# EAGLE board BleShield_teardrops_B2-16 (EAGLE 6.4)
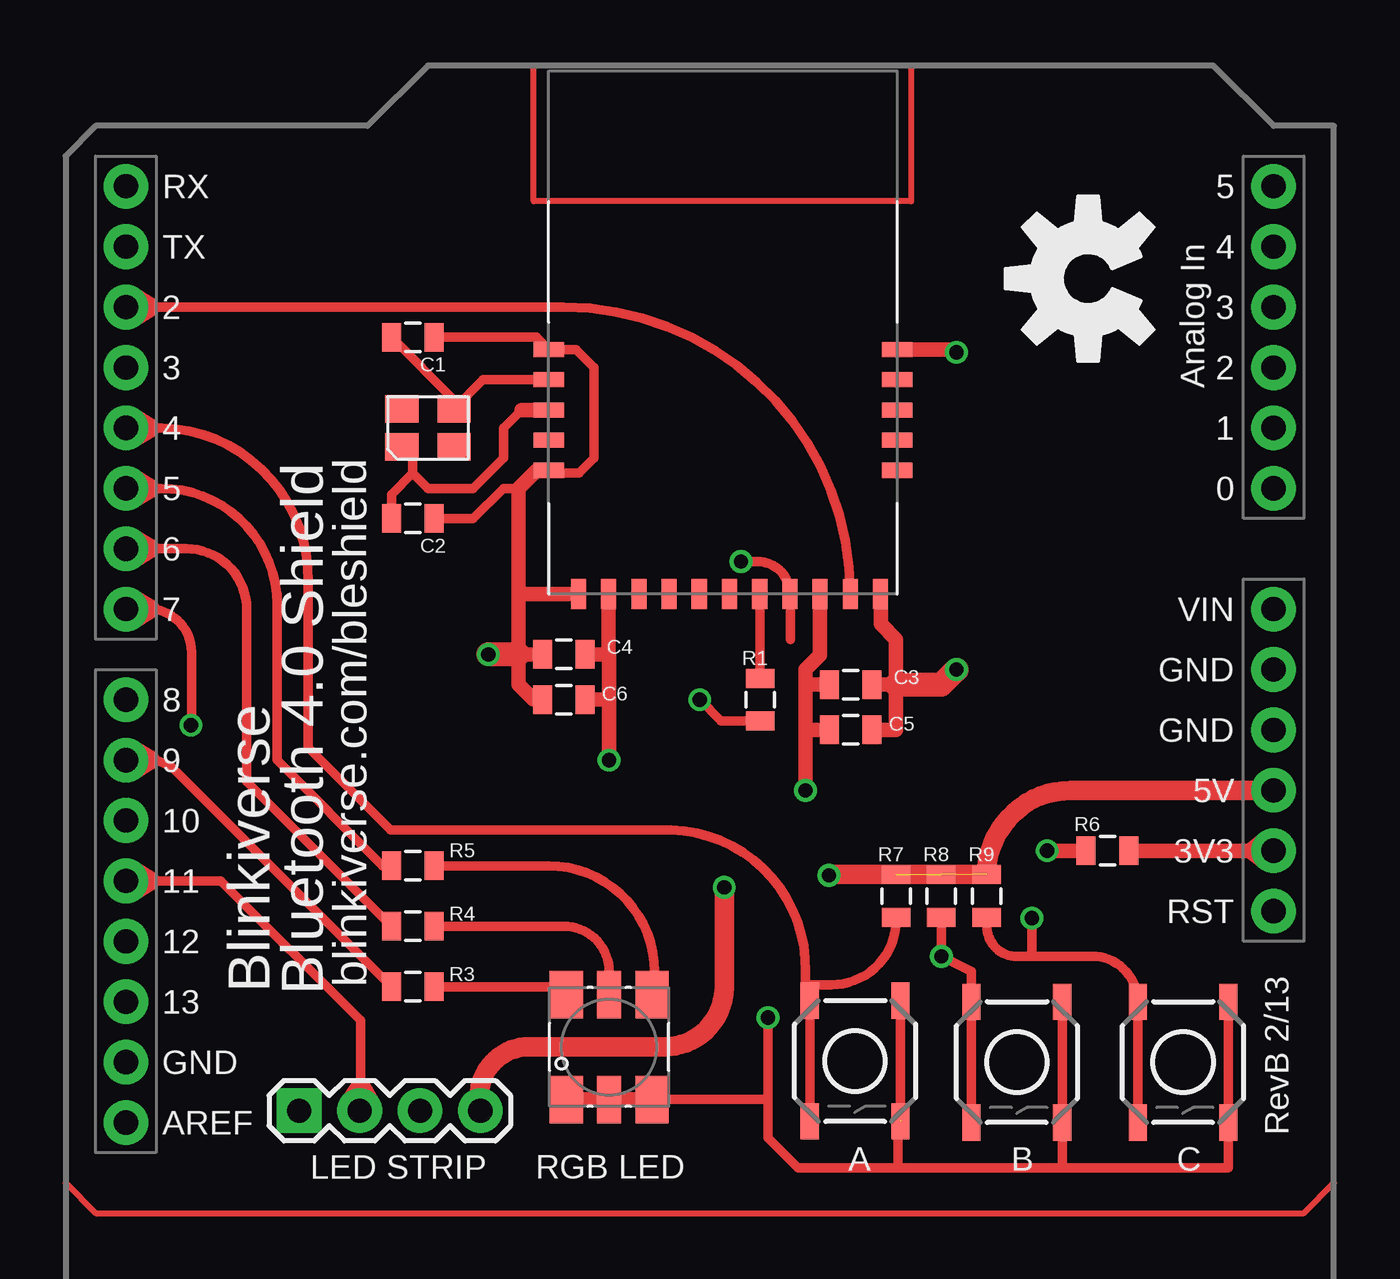
[diagram p0: board, top side]
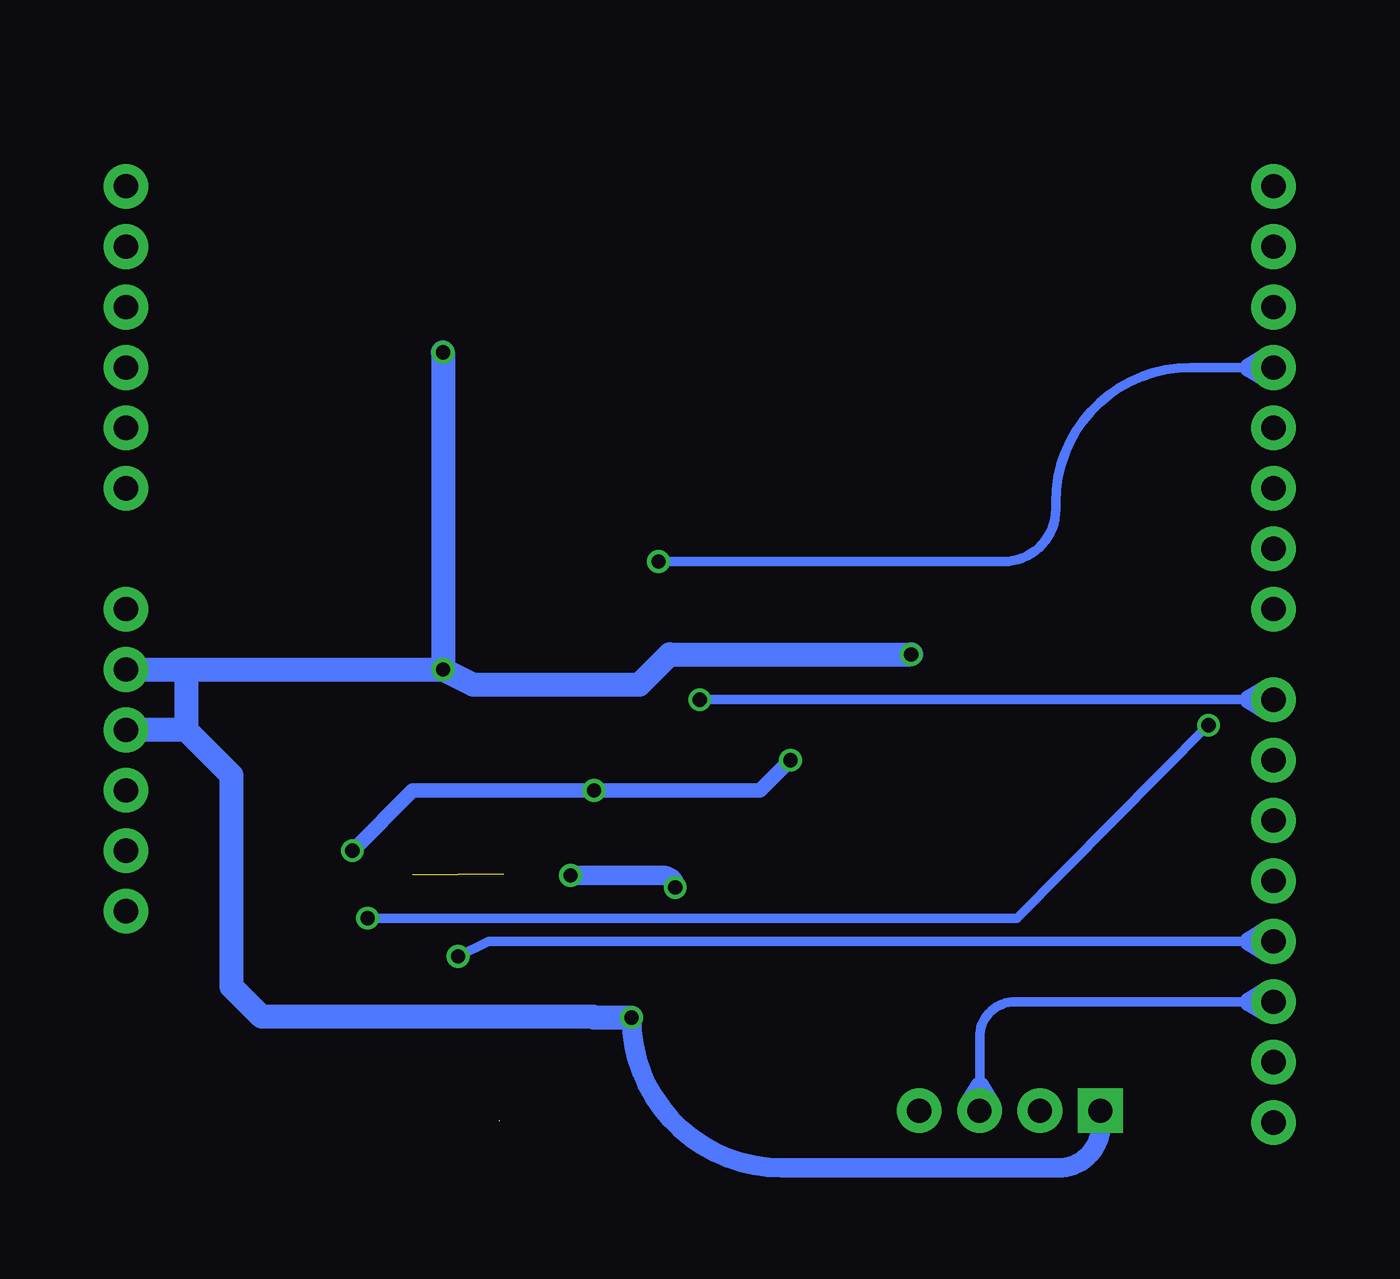
[diagram p1: board, bottom side, seen from below]

No outline drawn. Coordinates in mm, seen from the top.
Copper layers (1*16): Top 0.0356mm / dielectric 1.5011mm / Bottom 0.0356mm
Design rules "default": minimum track width 6mil, minimum drill 13mil, track to track 6mil, track to pad 6mil, pad to pad 6mil, via to via 6mil, smd to smd 6mil, copper to edge 15mil, drill to drill 6mil, minimum pad ring 7mil, minimum via ring 7mil, stop-mask expansion 4mil, vias tented up to drill 0mil, thermal gap 10mil

## Footprints (pad centres in the part's own frame; a part is rotated, then mirrored left to right if it is on the bottom)
TACTILE_SWITCH_SMD = smd 1.524 x 0.762: 1 -2.54,1.905; 2 2.54,1.905; 3 -2.54,-1.905; 4 2.54,-1.905
0805 = smd 0.8 x 1.2: 1 -0.9,0; 2 0.9,0
1X04 = drill 1.016 pad 1.88 square: 1 0,0 | drill 1.016 pad 1.88: 2 2.54,0; 3 5.08,0; 4 7.62,0
LED-TRICOLOR-5050-FIXED = smd 2 x 1.4: 1 -2.2,1.8; 3 -2.2,-1.8; 4 2.2,-1.8; 6 2.2,1.8 | smd 2 x 1: 2 -2.2,0; 5 2.2,0
DUEMILANOVE_SHIELD_NOHOLES = drill 1.016 pad 1.88: 3.3V 50.8,26.67; 5V 50.8,29.21; A0 50.8,41.91; A1 50.8,44.45; A2 50.8,46.99; A3 50.8,49.53; A4 50.8,52.07; A5 50.8,54.61; AREF 2.54,15.24; D2 2.54,49.53; D3 2.54,46.99; D4 2.54,44.45; D5 2.54,41.91; D6 2.54,39.37; D7 2.54,36.83; D8 2.54,33.02; D9 2.54,30.48; D10 2.54,27.94; D11 2.54,25.4; D12 2.54,22.86; D13 2.54,20.32; GND@0 50.8,31.75; GND@1 50.8,34.29; GND@2 2.54,17.78; RES 50.8,24.13; RX 2.54,54.61; TX 2.54,52.07; VIN 50.8,36.83
BG312L = smd 1.27 x 0.635: GND_1 0,10.28; GND_2 0,5.2; GND_5 14.65,10.28; P0_4 14.65,9.01; P0_5 14.65,7.74; P0_6 14.65,6.47; P0_7 14.65,5.2; P2_0 0,6.47; X_OSC1 0,9.01; X_OSC2 0,7.74 | smd 0.635 x 1.27: GND_3 1.25,0; GND_4 13.95,0; P1_4/CT 6.33,0; P1_5/RT 7.6,0; P1_6/TX 10.14,0; P1_7/RX 12.68,0; P2_1 5.06,0; P2_2 3.79,0; RESET 8.87,0; VDD_1 2.52,0; VDD_2 11.41,0
XS3225 = smd 1.4 x 1.15: P$1 -1.1,-0.8; P$2 1.1,-0.8; P$3 1.1,0.8; P$4 -1.1,0.8

## Placement (x,y rotation side)
A  [TACTILE_SWITCH_SMD]  33.2,6.4 270 top
B  [TACTILE_SWITCH_SMD]  40.01,6.35 270 top
C  [TACTILE_SWITCH_SMD]  46.99,6.35 270 top
C1  15pf  [0805]  14.61,36.83 180 top
C2  15pf  [0805]  14.61,29.21 180 top
C3  10uf  [0805]  33.02,22.23 180 top
C4  10uf  [0805]  20.95,23.5 0 top
C5  100nf  [0805]  33.02,20.32 180 top
C6  100nf  [0805]  20.95,21.59 0 top
LED STRIP  [1X04]  9.82,4.31 0 top
R1  10K  [0805]  29.21,21.59 90 top
R3  330  [0805]  14.61,9.53 0 top
R4  330  [0805]  14.61,12.06 0 top
R5  330  [0805]  14.61,14.61 0 top
R6  0  [0805]  43.81,15.24 180 top
R7  10K  [0805]  34.92,13.34 90 top
R8  10K  [0805]  36.83,13.34 90 top
R9  10K  [0805]  38.73,13.34 90 top
RGB LED  LED-TRICOLOR-5050"  [LED-TRICOLOR-5050-FIXED]  22.86,6.99 90 top
U1  ARDUINO_SHIELDNOHOLES  [DUEMILANOVE_SHIELD_NOHOLES]  0,-11.43 0 top
U$1  BG213L  [BG312L]  20.32,26.04 0 top
U$7  [OSHW-LOGO-L]  43,39.3 90 top
Y1  32.768KHz, 10 PPM  [XS3225]  15.24,33.02 0 top

## Library data of the parts
A B C C1-C6 LED STRIP R1 R3-R9 U1 = SparkFun
RGB LED U$7 Y1 = blinkiverse
U$1 = BLE

## Nets
3.3V: R6.1 U1.3.3V
5V: LED STRIP.4 R7.2 R8.2 R9.2 U1.5V
GND: A.1 A.2 B.1 B.2 C1.1 C2.1 C3.1 C4.1 C5.1 C6.1 C.1 C.2 LED STRIP.1 RGB LED.1 RGB LED.2 RGB LED.3 U1.GND@0 U1.GND@1 U$1.GND_1 U$1.GND_2 U$1.GND_3 U$1.GND_4 U$1.GND_5
LED_BLUE: R3.1 U1.D9
LED_GREEN: R5.1 U1.D5
LED_RED: R4.1 U1.D6
MOSI: LED STRIP.2 U1.D11
N$1: R1.2 U$1.RESET
N$2: R3.2 RGB LED.6
N$3: C1.2 U$1.X_OSC1 Y1.P$3
N$4: C2.2 U$1.X_OSC2 Y1.P$1
N$5: R5.2 RGB LED.4
N$6: R4.2 RGB LED.5
N$8: C3.2 C4.2 C5.2 C6.2 R6.2 U$1.VDD_1 U$1.VDD_2
RESET: R1.1 U1.D8
RX: U1.D2 U$1.P1_7/RX
SCK: LED STRIP.3 U1.D13
SWITCH_A: A.3 A.4 R7.1 U1.D4
SWITCH_B: B.3 B.4 R8.1 U1.D12
SWITCH_C: C.3 C.4 R9.1 U1.D7
TX: U1.D3 U$1.P1_6/TX

## Tracks (layer width: path | path; a pad name or v marks a point on that pad's centre or on a via)
3.3V
  Top 0.61: U1.3.3V 49.78,15.24 | 49.78,15.24 | 49.78,15.24 R6.1 | 49.78,15.24 | 49.78,15.24 50.4,15.74 | 49.78,15.24 50.4,14.74 | 50.4,14.74 | U1.3.3V 50.4,14.74 | 49.78,15.24 50.4,15.74 | U1.3.3V 50.4,15.74 | 49.78,15.24 50.4,14.74 | U1.3.3V 50.4,14.74 | 49.78,15.24 50.4,15.74 | U1.3.3V 50.4,15.74
5V  (via drill 0.6)  (2 unrouted)
  Top 0.813: v27.7,13.7 27.7,9.5 arc-90 25.2,7 19.5,7 arc90 17.4,4.9 17.4,4.36 arc90 LED STRIP.4 | U1.5V 42.28,17.78 arc90 R9.2 32.13,14.23 arc90 v32.1,14.2
  Bottom 0.813: v32.1,14.2 28.2,14.2 arc90 v27.7,13.7
GND  (via drill 0.6)  (1 unrouted)
  Top 0.406: v29.54,8.22 29.54,4.79 | 29.54,4.79 29.54,3.17 30.81,1.91 34.92,1.91 | B.2 B.1 41.91,1.91 | C.2 C.1 48.9,1.91 41.91,1.91 | 41.91,1.91 34.92,1.91 | 19.05,30.48 18.41,30.48 17.14,29.21 C2.1 | C1.1 19.8,36.83 U$1.GND_1 21.47,36.31 22.23,35.56 22.23,31.75 21.59,31.11 20.44,31.11 U$1.GND_2 | 34.92,1.91 35,1.98 35,3.8 35.1,3.9 A.1 | RGB LED.1 29.54,4.79
  Top 0.61: U$1.GND_3 19.05,26.04 | 19.05,23.5 C4.1 | C6.1 19.68,21.59 19.05,22.23 19.05,23.5 | C3.1 34.92,22.23 | 34.92,22.23 34.92,24.13 34.29,24.77 34.29,26.02 U$1.GND_4 | C5.1 34.92,20.32 34.92,22.23 | U$1.GND_5 37.34,36.31 v37.47,36.2 | 19.05,26.04 19.05,23.5 | U$1.GND_2 19.8,31.23 19.05,30.48 19.05,26.04 | RGB LED.3 RGB LED.2 RGB LED.1
  Top 1.016: 19.05,23.5 v17.78,23.5 | 34.92,22.23 36.83,22.23 v37.47,22.86
  Bottom 0.813: v29.54,8.22 arc-90 23.21,1.9 11.6,1.9 arc-90 9.8,3.7 9.8,4.29 arc-90 LED STRIP.1
  Bottom 1.016: v37.47,36.2 v37.47,22.86 | 48.26,20.32 46.35,18.41 46.35,9.53 45.09,8.26 31.14,8.26 arc-90 31.11,8.22 v29.54,8.22 | 48.26,20.32 U1.GND@0 | v37.47,22.86 36.2,22.23 29.21,22.23 27.94,23.5 v17.78,23.5 | 48.26,22.86 v37.47,22.86 | U1.GND@1 48.26,22.86 | 48.26,22.86 48.26,20.32
LED_BLUE
  Top 0.406: U1.D9 3.56,19.05 3.81,19.05 4.45,18.79 R3.1
  Top 0.813: 3.56,19.05 2.82,19.5 U1.D9 2.82,18.6 3.56,19.05
LED_GREEN
  Top 0.406: 8.89,26.04 8.89,25.6 | 8.89,25.6 8.89,19.05 13.34,14.61 R5.1 | U1.D5 3.56,30.48 4.01,30.48 arc-90 8.89,25.6
  Top 0.813: 3.56,30.48 2.82,30.93 U1.D5 2.82,30.03 3.56,30.48
LED_RED
  Top 0.406: R4.1 7.62,18.15 7.62,25.4 arc90 5.08,27.94 3.56,27.94 U1.D6
  Top 0.813: 3.56,27.94 2.82,28.39 U1.D6 2.82,27.49 3.56,27.94
MOSI
  Top 0.406: U1.D11 3.56,13.97 6.53,13.97 12.4,8.1 12.4,5.33 12.4,4.34 arc-90 LED STRIP.2
  Top 0.813: 3.56,13.97 2.82,14.42 U1.D11 2.82,13.52 3.56,13.97 | 12.4,5.33 11.92,4.61 LED STRIP.2 12.83,4.57 12.4,5.33
N$1
  Top 0.406: U$1.RESET 29.21,26.04 R1.2
N$2
  Top 0.406: R3.2 20.72,9.53 RGB LED.6
N$3
  Top 0.406: U$1.X_OSC1 17.57,35.05 Y1.P$3 16.34,34.2 C1.2
N$4
  Top 0.406: 19.17,33.77 18.41,33.02 18.41,31.75 17.14,30.48 15.24,30.48 14.61,31.11 | 14.61,31.11 14.61,31.75 Y1.P$1 | C2.2 13.71,30.21 14.61,31.11
  Top 0.61: U$1.X_OSC2 19.17,33.77
N$5
  Top 0.406: RGB LED.4 24.77,9.29 24.77,10.16 arc90 20.32,14.61 R5.2
N$6
  Top 0.406: RGB LED.5 22.86,10.16 arc90 20.95,12.06 R4.2
N$8  (via drill 0.6)
  Top 0.61: R6.2 v41.27,15.24 | v31.11,17.78 31.11,20.32 | 31.11,20.32 C5.2 | C3.2 31.11,22.23 | 31.11,22.23 31.11,20.32 | U$1.VDD_2 31.73,23.48 31.11,22.86 31.11,22.23 | U$1.VDD_1 22.84,23.52 22.86,23.5 | 22.86,23.5 C4.2 | C6.2 22.86,21.59 | 22.86,21.59 22.86,23.5 | v22.86,19.05 22.86,21.59
  Bottom 0.61: v41.27,15.24 38.73,17.78 v31.11,17.78 24.13,17.78 v22.86,19.05
N$17
  Top 0.254: 53.34,1.27 53.34,45.72 50.8,45.72 48.26,48.26 35.56,48.26 35.56,42.55 19.68,42.55 19.68,48.26 15.24,48.26 12.7,45.72 1.27,45.72 0,44.45 0,1.27 1.27,0 52.07,0 53.34,1.27
RESET  (via drill 0.6)
  Top 0.406: v26.67,21.59 27.57,20.69 R1.1
  Bottom 0.406: U1.D8 3.56,21.59 v26.67,21.59
  Bottom 0.813: 3.56,21.59 2.82,22.04 U1.D8 2.82,21.14 3.56,21.59
RX
  Top 0.406: U1.D2 3.56,38.1 20.93,38.1 arc-90 U$1.P1_7/RX
  Top 0.813: 3.56,38.1 2.82,38.55 U1.D2 2.82,37.65 3.56,38.1
SCK
  Bottom 0.406: U1.D13 3.56,8.89 13.41,8.89 arc-90 14.9,7.4 14.9,5.33 LED STRIP.3 arc90 LED STRIP.3
  Bottom 0.813: 3.56,8.89 2.82,9.34 U1.D13 2.82,8.44 3.56,8.89 | 14.9,5.33 14.45,4.59 LED STRIP.3 15.36,4.59 14.9,5.33
SWITCH_A
  Top 0.406: A.4 A.3 arc-90 31.11,9.12 31.11,9.6 | 31.11,9.6 31.11,10.16 arc90 25.46,16.11 13.67,16.11 10.2,19.59 10.2,26.57 arc90 4.04,33.02 3.56,33.02 U1.D4 | R7.1 34.92,12.32 arc-90 32.2,9.6 31.11,9.6
  Top 0.813: 3.56,33.02 2.82,33.47 U1.D4 2.82,32.57 3.56,33.02
SWITCH_B  (via drill 0.6)
  Top 0.406: B.4 B.3 38.1,10.16 v36.83,10.79 R8.1
  Bottom 0.406: U1.D12 3.56,11.43 35.56,11.43 v36.83,10.79
  Bottom 0.813: 3.56,11.43 2.82,11.88 U1.D12 2.82,10.98 3.56,11.43
SWITCH_C  (via drill 0.6)
  Top 0.406: C.4 C.3 arc90 43.17,10.8 40.4,10.8 | R9.1 38.73,12.06 arc90 40,10.8 40.4,10.8 | v40.64,12.4 40.64,11.04 arc-90 40.4,10.8 | U1.D7 3.5,25.4 arc-90 5.3,23.6 5.3,20.6 arc90 v5.28,20.52
  Top 0.813: 3.56,25.4 2.82,25.85 U1.D7 2.82,24.95 3.56,25.4
  Bottom 0.406: v40.64,12.4 13.34,12.4 v5.28,20.52
TX  (via drill 0.6)
  Top 0.406: 30.48,24.13 30.48,26.02 U$1.P1_6/TX arc90 29.09,27.4 v28.4,27.4
  Bottom 0.406: v28.4,27.4 13.9,27.4 arc-90 11.7,29.6 11.7,29.9 arc90 6.04,35.56 3.56,35.56 U1.D3
  Bottom 0.813: 3.56,35.56 2.82,36.01 U1.D3 2.82,35.11 3.56,35.56

## Text on the board
tNames: Bluetooth 4.0 Shield | Blinkiverse | blinkiverse.com/bleshield | RevB 2/13